# Altium PCB LKBulls2023.PcbDoc (part 1 of 2)
Units mm, origin at the board's own origin, x right, y up, seen from the top; angles counter-clockwise.
Board outline 150 x 145 mm, 2 copper layers (Top Layer, Bottom Layer), stack 1.586 mm thick; 120 components, 144 nets, 581 pads, 331 vias.
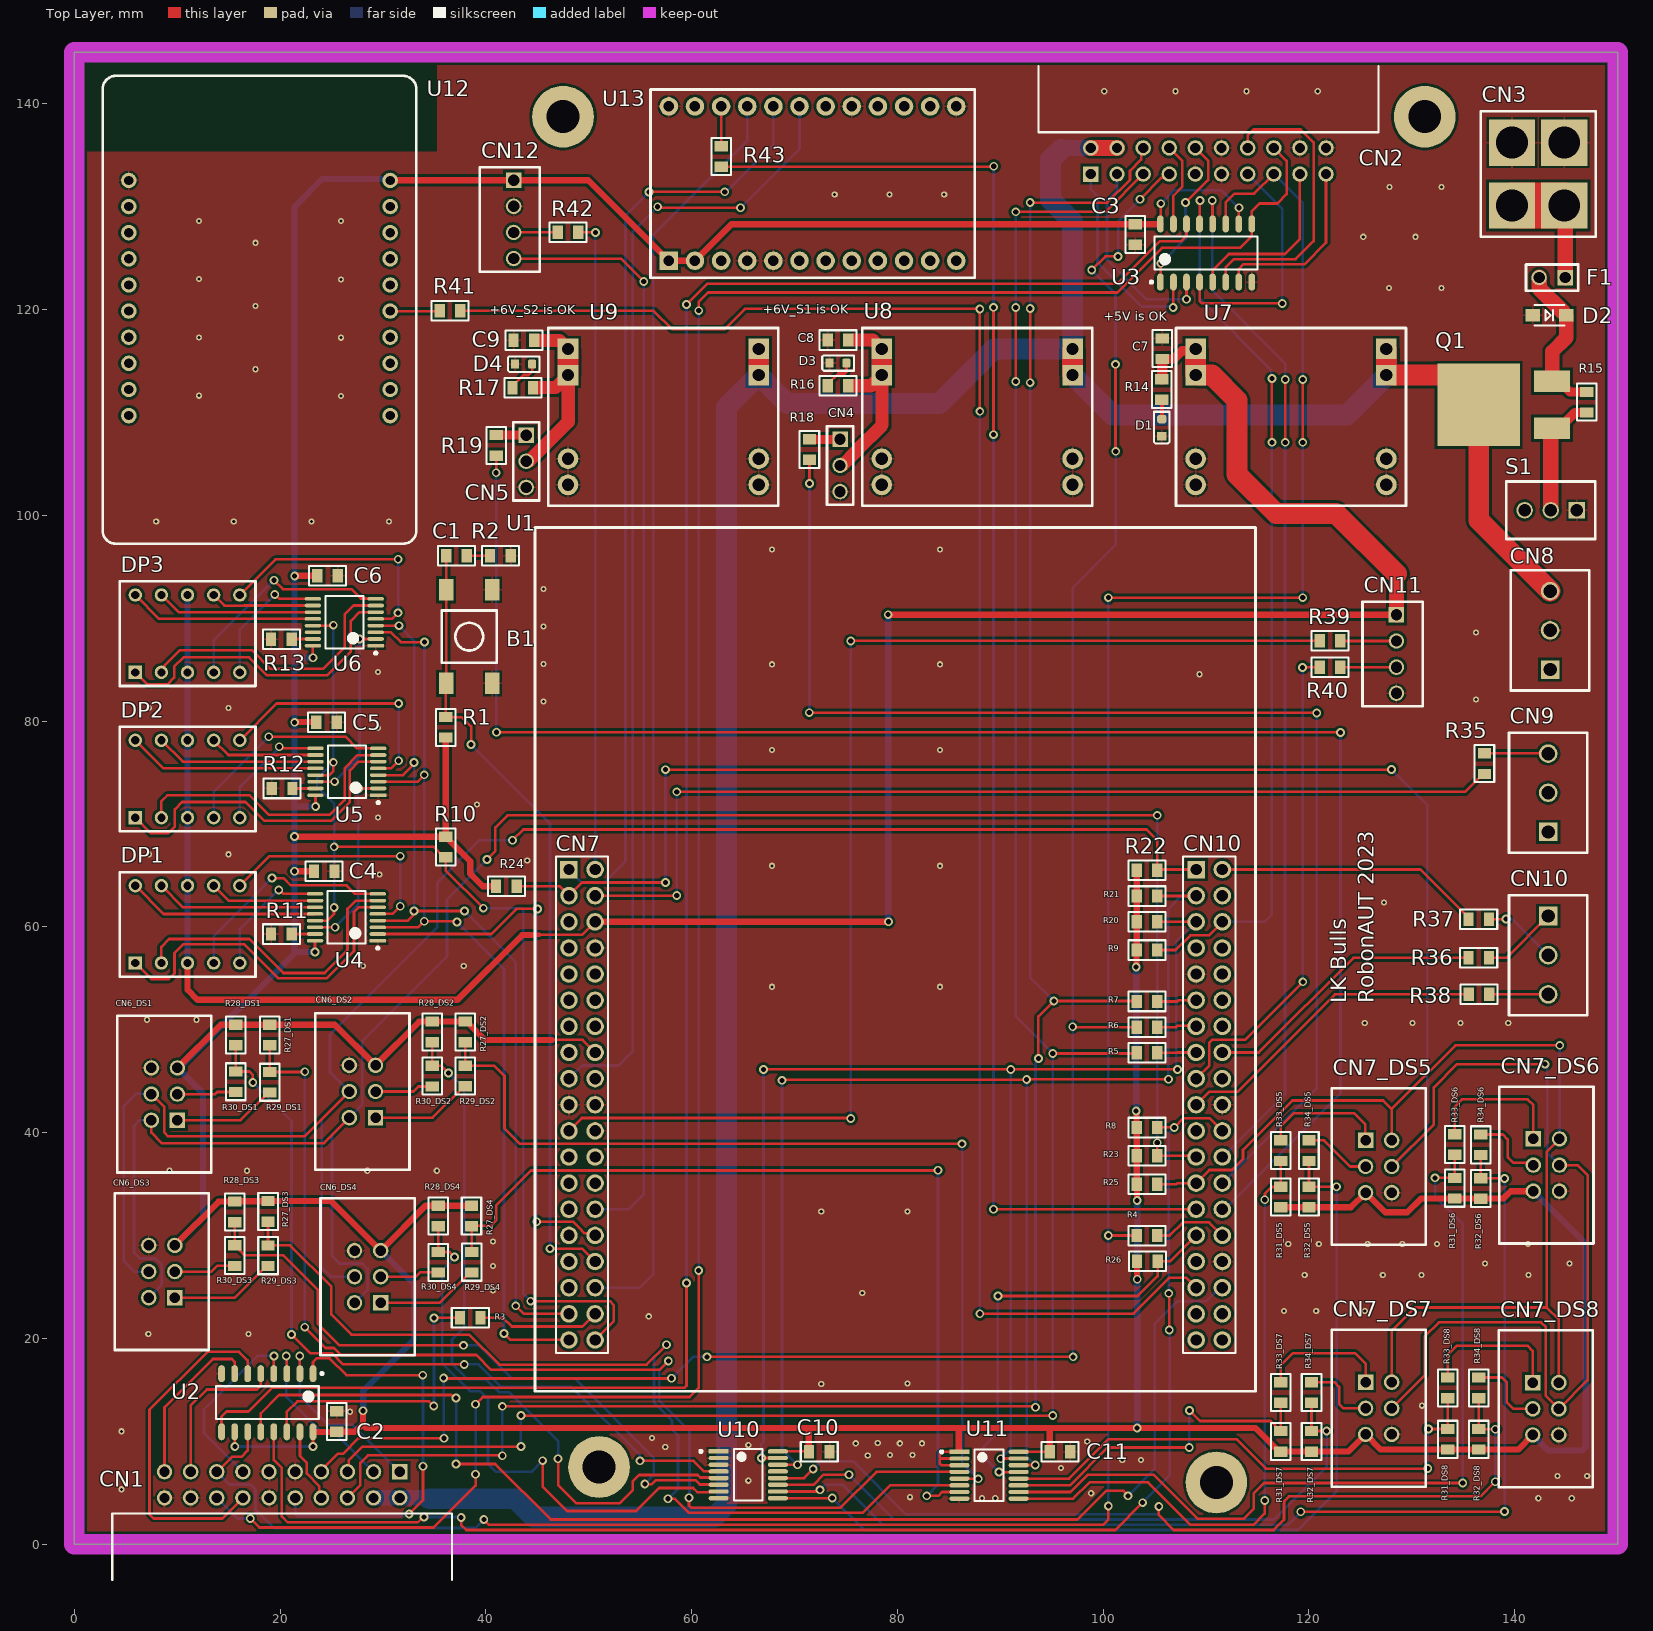
[diagram p0: Top Layer view]
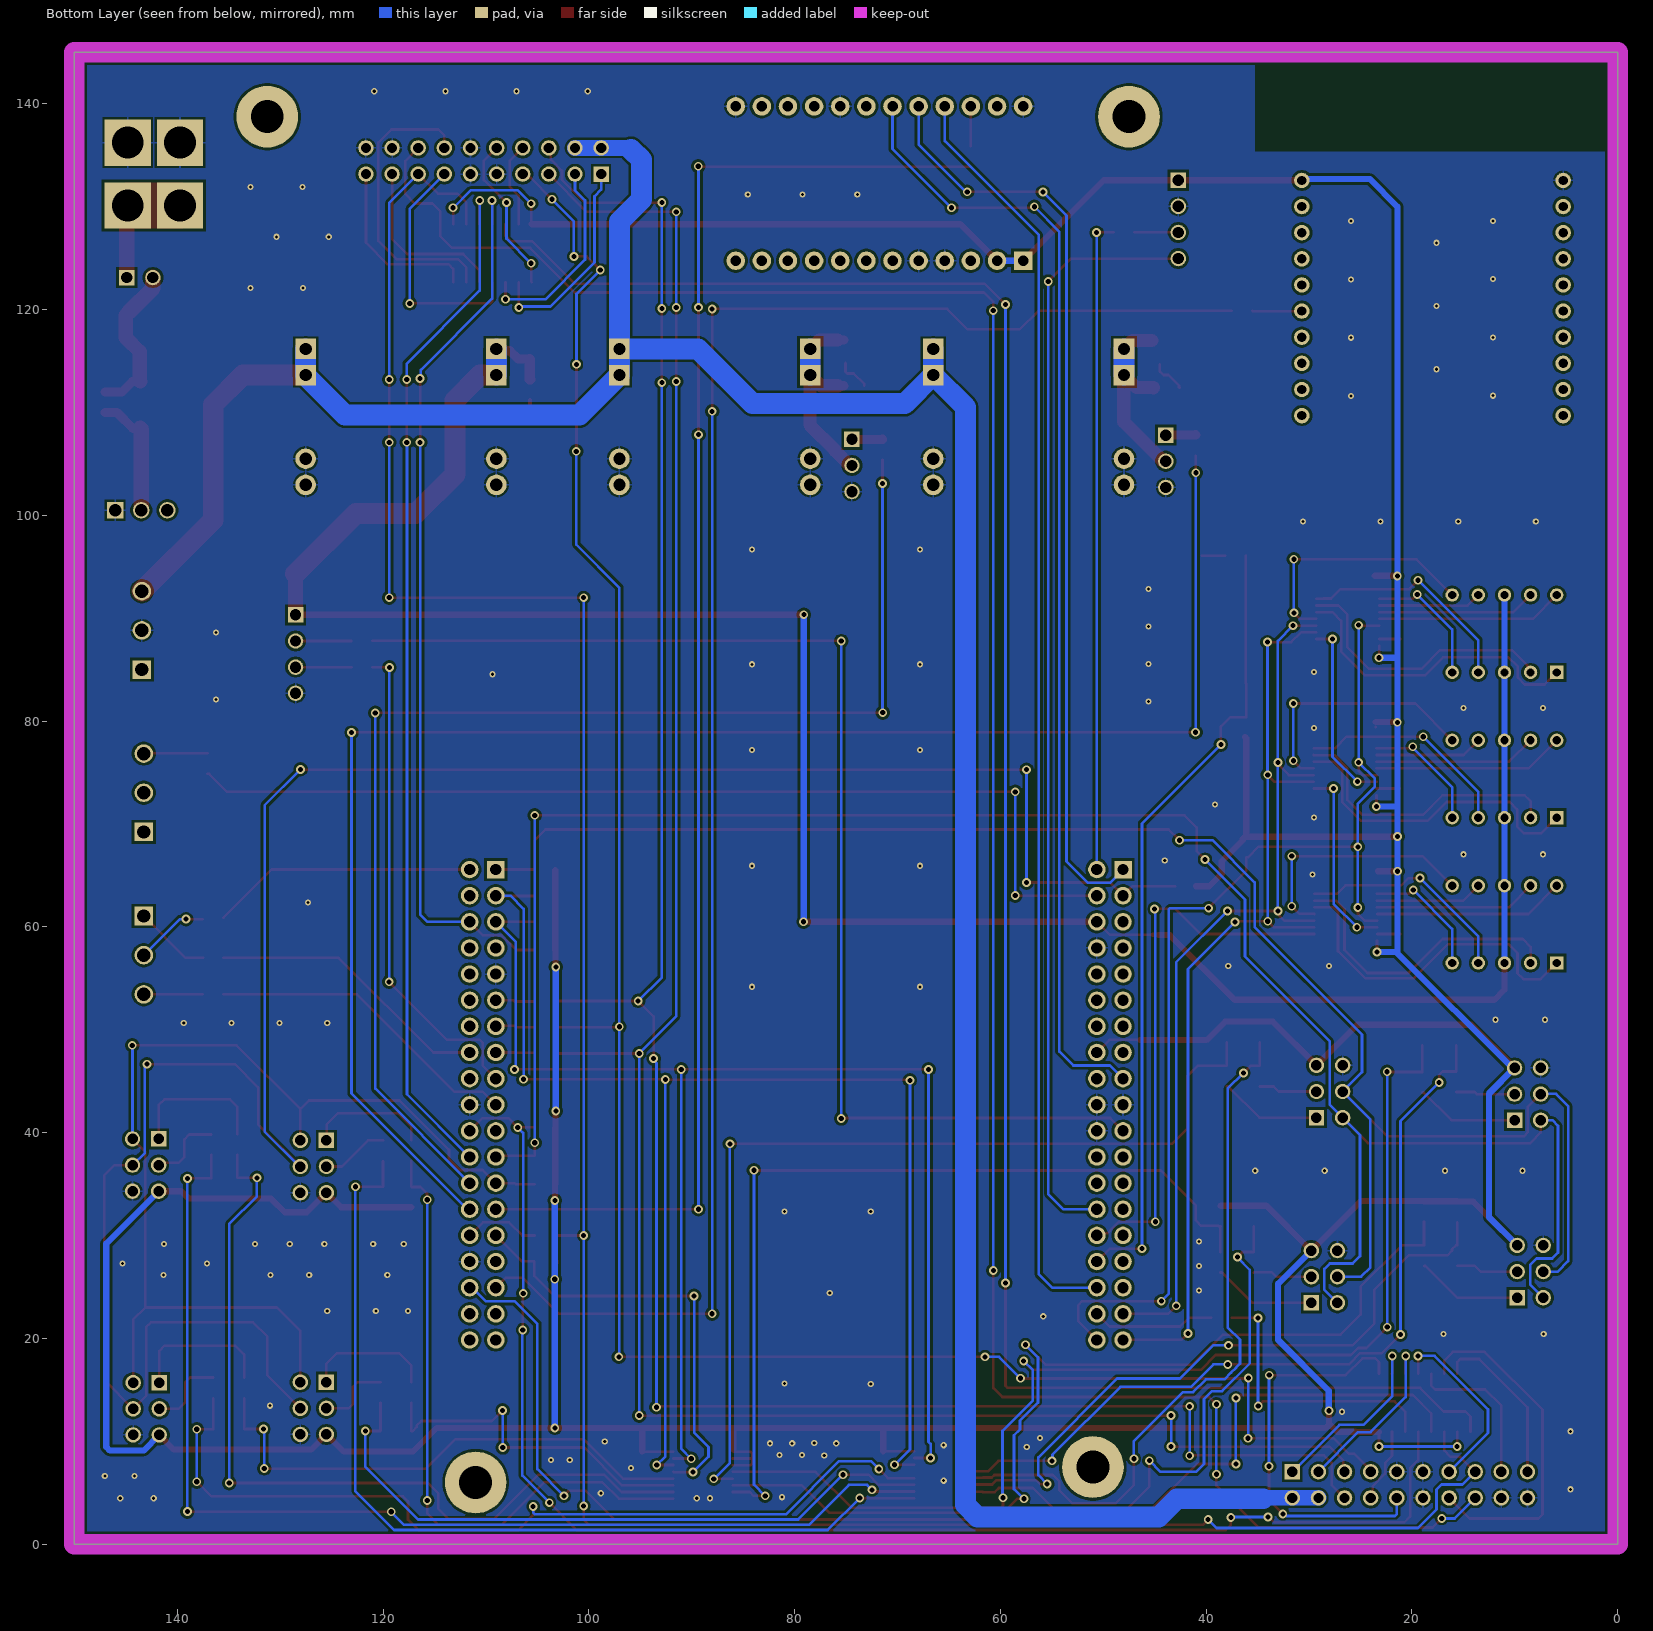
[diagram p1: Bottom Layer view, seen from below]
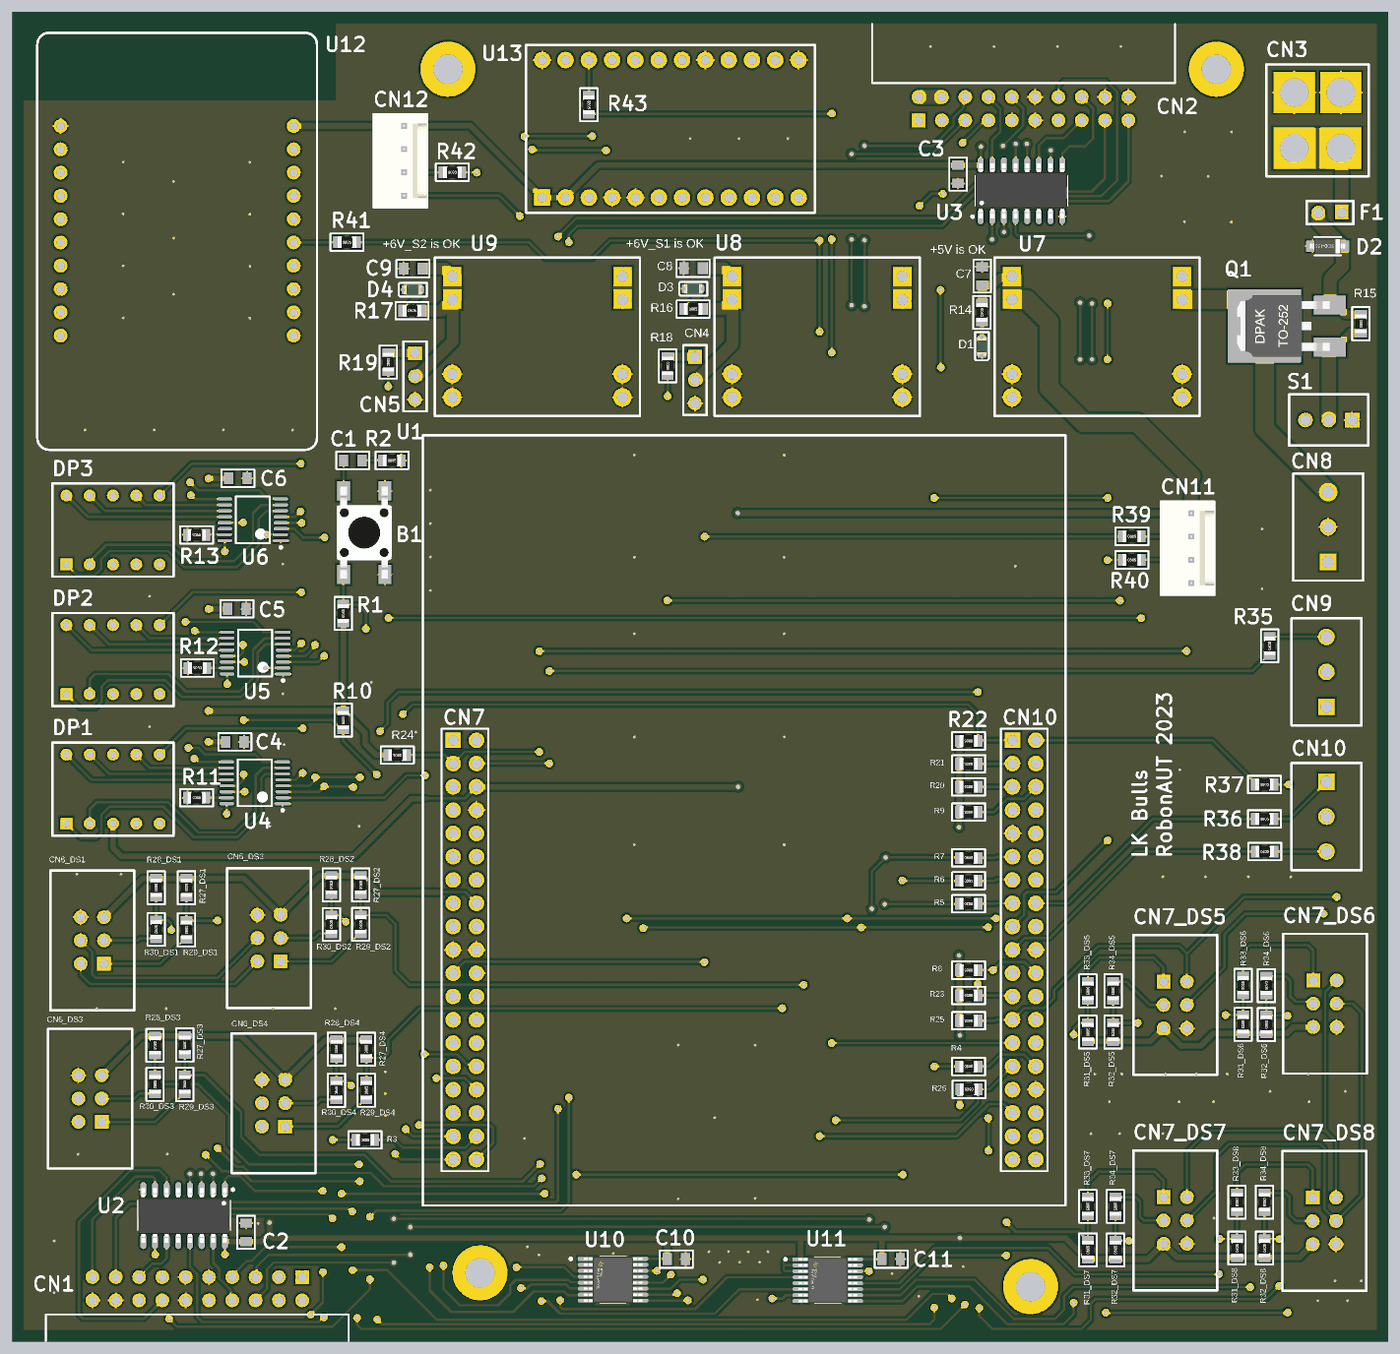
[diagram p3: 3D render of the assembled board from above, using the file's embedded part models]

## Layer stack, top to bottom
Top Solder: solder mask 0.0102, Solder Resist, Dk 3.5
Top Layer: signal copper 0.018
Dielectric1: core 1.55, FR-4, Dk 4.8
Bottom Layer: signal copper 0.018
Bottom Solder: solder mask 0.0102, Solder Resist, Dk 3.5

## Board outline
150,0 0,0 0,145 150,145

## Design rules (kind name [scope] priority, off if disabled: settings)
BoardOutlineClearance [All] p1: gap=0.25 ignorepadtopadclearanceinfootprint=FALSE except(0: Arc-SplitContinuation Track-SplitContinuation SMDPad-SplitContinuation THPad-SplitContinuation Via-SplitContinuation Fill-SplitContinuation Poly-SplitContinuation Region-SplitContinuation Text-SplitContinuation)
Clearance Clearance-xPP-xTP-xTT [All] p1: gap=0.254 ignorepadtopadclearanceinfootprint=FALSE except(0: Arc-Hole Track-Hole SMDPad-Hole THPad-Hole Via-Hole Fill-Hole Poly-Hole Region-Hole Text-Hole; 0.229: SMDPad-SMDPad)
ComponentClearance [All] p1: gap=0.25 collisioncheckmode=3 verticalgap=0.25 showdistances=FALSE
DiffPairsRouting [All] p1: maxlimit=0.25 minlimit=0.25 mostfreqgap=0.25 toplayer_minwidth=0.381 toplayer_maxwidth=0.381 toplayer_prefwidth=0.381 bottomlayer_minwidth=0.381 bottomlayer_maxwidth=0.381 bottomlayer_prefwidth=0.381 maxuncoupledlength=12.5
Height [All] p1: minheight=0 maxheight=25 prefheight=12.5
HoleSize HoleSize-PTH [All] p1: absolutevalues=TRUE maxlimit=6 minlimit=0.3 maxpercent=80.000 minpercent=20.000
HoleToHoleClearance [All] p1: gap=0.35 allowstackedmicrovias=TRUE
MinimumAnnularRing "Minimum IAR  >0.45mm" [((ObjectKind = 'Pad') OR (ObjectKind = 'Via')) And (Layer = 'MultiLayer') And (HoleDiameter > AsMM(0.45))] p1: minimumring=0.175 // minimum inner annular ring for pads > 0.45mm finished hole size
MinimumAnnularRing "Minimum IAR <=0.45mm" [((ObjectKind = 'Pad') OR (ObjectKind = 'Via')) And (Layer = 'MultiLayer') And (HoleDiameter <= AsMM(0.45))] p2: minimumring=0.15 // minimum inner annular ring for pads <= 0.45mm finished hole size
MinimumSolderMaskSliver [All] p1: minsoldermaskwidth=0.08
PlaneClearance PlaneClearance-IPI [All] p1: clearance=0.25
PlaneConnect [All] p1: planeconnectstyle=Relief reliefexpansion=0.175 reliefentries=4 reliefconductorwidth=0.2 reliefairgap=0.2
PolygonConnect PolygonConnect_4 [InNet('GND') vs HasFootprint('TáP AKKSIHOZ')] p1: connectstyle=Relief reliefconductorwidth=2.286 reliefentries=4 polygonreliefangle="90 Angle" airgapwidth=0.254
PolygonConnect PolygonConnect_3 [InNet('NetF1_2') vs InNet('NetF1_2')] p2: connectstyle=Relief reliefconductorwidth=1.27 reliefentries=4 polygonreliefangle="90 Angle" airgapwidth=0.254
PolygonConnect PolygonConnect_2 [InNet('11.1V') vs InNet('11.1V')] p3: connectstyle=Relief reliefconductorwidth=1.27 reliefentries=4 polygonreliefangle="90 Angle" airgapwidth=0.254
PolygonConnect PolygonConnect_1 [InNet('NetCN_4_1') vs InNet('NetCN_4_1')] p4: connectstyle=Relief reliefconductorwidth=1.27 reliefentries=4 polygonreliefangle="90 Angle" airgapwidth=0.254
PolygonConnect [InNet('6V_1') vs InNet('6V_1')] p5: connectstyle=Relief reliefconductorwidth=1.27 reliefentries=4 polygonreliefangle="90 Angle" airgapwidth=0.254
PolygonConnect PolygonConnect-xTW [All] p6: connectstyle=Relief reliefconductorwidth=0.2 reliefentries=4 polygonreliefangle="90 Angle" airgapwidth=0.2
RoutingCorners [All] p1: cornerstyle=45-Degree minsetback=2.5 maxsetback=2.5
RoutingVias My_RoutingVias [All] p1: holewidth=0.4 width=0.8 viastyle="Through Hole" minholewidth=0.3 minwidth=0.6 maxholewidth=0.7 maxwidth=1.3
RoutingVias "RoutingVias > 0.45mm" [(ObjectKind = 'Via') And (HoleDiameter > AsMM(0.45))] p2: holewidth=0.5 width=0.85 viastyle="Through Hole" minholewidth=0.5 minwidth=0.85 maxholewidth=0.9 maxwidth=1.25 // finishet hole size > 0.45mm
RoutingVias "RoutingVias <= 0.45mm" [(ObjectKind = 'Via') And (HoleDiameter <= AsMM(0.45))] p3: holewidth=0.3 width=0.65 viastyle="Through Hole" minholewidth=0.25 minwidth=0.6 maxholewidth=0.45 maxwidth=0.8 // finishet hole size <= 0.45mm
SilkToSilkClearance [All] p1: silktosilkclearance=0.2
SilkToSolderMaskClearance SilkscreenOverComponentPads [IsPad] p1: minsilkscreentomaskgap=0.17 clearancetoexposedcopper=TRUE
SolderMaskExpansion [All] p1: expansion=0.1 istentingtop=FALSE
UnRoutedNet [All] p1: checkbadconnections=TRUE
Width Width-xTW [All] p1: maxlimit=6 minlimit=0.254 preferedwidth=0.305 minimp=50.000000 maximp=50.000000 favimp=50.000000
18 further rules are at their usual default settings.

## Classes and differential pairs
channel class VL53L1X-SATEL: DS1 DS2 DS3 DS4
channel class 53L0-SATEL-I1: DS5 DS6 DS7 DS8

## Components (designator, comment, footprint, x,y, rotation, side; value= is the part's Value field where it differs from the comment)
B1 "Button" FP_BTN_SMD 38.379,88.214 r0 top
C1 "100nF" FP_0805_CAP_085 37.135,96.088 r180 top
C2 "100nF" FP_0805_CAP_085 25.501,11.923 r270 top
C3 "100nF" FP_0805_CAP_085 103.1,127.3 r90 top
C4 "100nF" FP_0805_CAP_085 24.282,65.405 r180 top
C5 "100nF" FP_0805_CAP_085 24.511,79.908 r180 top
C6 "100nF" FP_0805_CAP_085 24.613,94.132 r180 top
C7 "100nF" FP_0805_CAP_085 105.725,116.2 r270 top
C8 "100nF" FP_0805_CAP_085 74.219,117.043 r0 top
C9 "100nF" FP_0805_CAP_085 43.688,117.018 r0 top
C10 "100nF" FP_0805_CAP_085 72.4,9 r180 top
C11 "100nF" FP_0805_CAP_085 95.8,9 r180 top
CN1 "Line Sensor Connector" CONNECTOR-20P 31.62,7.04 r0 top
CN2 "Line Sensor Connector" CONNECTOR-20P 98.8,133.175 r180 top
CN3 "LiPo Connector" FP_BATTERY 142.275,133.175 r0 top
CN4 "Front Servo" FP_CONN3_TUSKE_254MM 74.422,107.391 r180 top
CN5 "Rear Servo" FP_CONN3_TUSKE_254MM 43.917,107.798 r180 top
CN6_DS1 "ST VL53L1X-SATEL" FP_DISTANCE_SENSOR 8.75,43.75 r90 top (schematic designator CN6)
CN6_DS2 "ST VL53L1X-SATEL" FP_DISTANCE_SENSOR 28,44 r90 top (schematic designator CN6)
CN6_DS3 "ST VL53L1X-SATEL" FP_DISTANCE_SENSOR 8.5,26.5 r90 top (schematic designator CN6)
CN6_DS4 "ST VL53L1X-SATEL" FP_DISTANCE_SENSOR 28.5,26 r90 top (schematic designator CN6)
CN7_DS5 "ST VL53L0X-SATEL" FP_DISTANCE_SENSOR 126.77,36.71 r270 top (schematic designator CN7)
CN7_DS6 "ST VL53L0X-SATEL" FP_DISTANCE_SENSOR 143.08,36.85 r270 top (schematic designator CN7)
CN7_DS7 "ST VL53L0X-SATEL" FP_DISTANCE_SENSOR 126.77,13.21 r270 top (schematic designator CN7)
CN7_DS8 "ST VL53L0X-SATEL" FP_DISTANCE_SENSOR 143.02,13.16 r270 top (schematic designator CN7)
CN8 "Motor Control CN2" DC_Drive_CN_Stelvio 143.434,88.824 r270 top
CN9 "Motor Control CN4" DC_Drive_CN_Stelvio 143.25,73.037 r270 top
CN10 "Motor Control CN5" DC_Drive_CN_Stelvio 143.25,57.25 r90 top
CN11 "Magnetic Encoder" FP_CONN4_TAP_254MM 128.5,90.33 r180 top
CN12 "Bluetooth Module" FP_CONN4_TAP_254MM 42.7,132.58 r180 top
D1 "LED" FP_0805_LED_GREEN 105.7,108.525 r270 top
D2 "16V" FP_SOD-123 141.739,119.456 r0 top
D3 "LED" FP_0805_LED_GREEN 74.219,114.808 r180 top
D4 "LED" FP_0805_LED_GREEN 43.663,114.706 r180 top
DP1 "7 Segment Display" FP_7_Segment_Display 11,60.25 r90 top
DP2 "7 Segment Display" FP_7_Segment_Display 11,74.375 r90 top
DP3 "7 Segment Display" FP_7_Segment_Display 11,88.5 r90 top
F1 "Fuse" FP_CONN2_TUSKE_254MM 144.907,123.114 r90 top
Q1 "PMOS" FP_DPAK-TO252 136.5,110.75 r90 top
R1 "4K7" FP_0805_RES 36.093,79.4 r270 top
R2 "100R" FP_0805_RES 41.402,96.088 r0 top
R3 "1K" FP_0805_RES 38.481,21.996 r0 top
R4 "1K" FP_0805_RES 104.25,30 r0 top
R5 "1K" FP_0805_RES 104.25,47.75 r0 top
R6 "1K" FP_0805_RES 104.25,50.25 r0 top
R7 "1K" FP_0805_RES 104.25,52.75 r0 top
R8 "10K" FP_0805_RES 104.25,40.5 r180 top
R9 "10K" FP_0805_RES 104.25,57.75 r180 top
R10 "10K" FP_0805_RES 36.093,67.767 r90 top
R11 "3K9" FP_0805_RES 20.117,59.309 r180 top
R12 "3K9" FP_0805_RES 20.193,73.457 r180 top
R13 "3K9" FP_0805_RES 20.117,87.96 r180 top
R14 "560R" FP_0805_RES 105.7,112.225 r90 top
R15 "100K" FP_0805_RES 147,111 r90 top
R16 "750R" FP_0805_RES 74.219,112.598 r0 top
R17 "750R" FP_0805_RES 43.586,112.42 r0 top
R18 "1K" FP_0805_RES 71.45,106.401 r90 top
R19 "1K" FP_0805_RES 40.996,106.807 r90 top
R20 "1K" FP_0805_RES 104.25,60.5 r180 top
R21 "1K" FP_0805_RES 104.25,63 r180 top
R22 "1K" FP_0805_RES 104.25,65.5 r180 top
R23 "1K" FP_0805_RES 104.25,37.75 r180 top
R24 "1K" FP_0805_RES 41.986,63.957 r180 top
R25 "1K" FP_0805_RES 104.25,35 r180 top
R26 "10K" FP_0805_RES 104.292,27.508 r180 top
R27_DS1 "10K" FP_0805_RES 19,49.5 r270 top (schematic designator R27)
R27_DS2 "10K" FP_0805_RES 38,49.8 r270 top (schematic designator R27)
R27_DS3 "10K" FP_0805_RES 18.825,32.35 r270 top (schematic designator R27)
R27_DS4 "10K" FP_0805_RES 38.6,31.9 r270 top (schematic designator R27)
R28_DS1 "10K" FP_0805_RES 15.7,49.5 r270 top (schematic designator R28)
R28_DS2 "10K" FP_0805_RES 34.8,49.8 r270 top (schematic designator R28)
R28_DS3 "10K" FP_0805_RES 15.575,32.3 r270 top (schematic designator R28)
R28_DS4 "10K" FP_0805_RES 35.35,31.9 r270 top (schematic designator R28)
R29_DS1 "1K" FP_0805_RES 19,44.9 r90 top (schematic designator R29)
R29_DS2 "1K" FP_0805_RES 38,45.5 r90 top (schematic designator R29)
R29_DS3 "1K" FP_0805_RES 18.821,28.042 r90 top (schematic designator R29)
R29_DS4 "1K" FP_0805_RES 38.608,27.407 r90 top (schematic designator R29)
R30_DS1 "1K" FP_0805_RES 15.7,44.95 r90 top (schematic designator R30)
R30_DS2 "1K" FP_0805_RES 34.798,45.491 r90 top (schematic designator R30)
R30_DS3 "1K" FP_0805_RES 15.575,28.05 r90 top (schematic designator R30)
R30_DS4 "1K" FP_0805_RES 35.35,27.4 r90 top (schematic designator R30)
R31_DS5 "10K" FP_0805_RES 117.25,33.75 r90 top (schematic designator R31)
R31_DS6 "10K" FP_0805_RES 134.162,34.6 r90 top (schematic designator R31)
R31_DS7 "10K" FP_0805_RES 117.25,10 r90 top (schematic designator R31)
R31_DS8 "10K" FP_0805_RES 133.5,10.2 r90 top (schematic designator R31)
R32_DS5 "10K" FP_0805_RES 120,33.75 r90 top (schematic designator R32)
R32_DS6 "10K" FP_0805_RES 136.699,34.575 r90 top (schematic designator R32)
R32_DS7 "10K" FP_0805_RES 120.25,10 r90 top (schematic designator R32)
R32_DS8 "10K" FP_0805_RES 136.5,10.2 r90 top (schematic designator R32)
R33_DS5 "1K" FP_0805_RES 117.25,38.25 r270 top (schematic designator R33)
R33_DS6 "1K" FP_0805_RES 134.162,38.85 r270 top (schematic designator R33)
R33_DS7 "1K" FP_0805_RES 117.25,14.75 r270 top (schematic designator R33)
R33_DS8 "1K" FP_0805_RES 133.5,15.2 r270 top (schematic designator R33)
R34_DS5 "1K" FP_0805_RES 120,38.25 r270 top (schematic designator R34)
R34_DS6 "1K" FP_0805_RES 136.699,38.825 r270 top (schematic designator R34)
R34_DS7 "1K" FP_0805_RES 120.25,14.75 r270 top (schematic designator R34)
R34_DS8 "1K" FP_0805_RES 136.5,15.2 r270 top (schematic designator R34)
R35 "1K" FP_0805_RES 137.058,75.87 r90 top
R36 "1K" FP_0805_RES 136.5,57 r0 top
R37 "1K" FP_0805_RES 136.5,60.75 r0 top
R38 "1K" FP_0805_RES 136.525,53.442 r0 top
R39 "1K" FP_0805_RES 122.047,87.808 r0 top
R40 "1K" FP_0805_RES 122.047,85.242 r0 top
R41 "1K" FP_0805_RES 36.5,119.888 r0 top
R42 "1K" FP_0805_RES 47.981,127.508 r180 top
R43 "1K" FP_0805_RES 62.865,134.874 r270 top
S1 "SPDT" FP_SPDT 143.5,100.5 r90 top
U1 "NUCLEO-F446RE" FP_NUCLEO-64 48.075,65.575 r0 top
U2 "74HC595D" SO16 18.75,13.75 r270 top
U3 "74HC595D" SO16 110,125.5 r90 top
U4 "STP08CP05TTR" SOP127P600-sajat_0095-015 26.441,60.935 r180 top
U5 "STP08CP05TTR" SOP127P600-sajat_0095-015 26.484,75.082 r180 top
U6 "STP08CP05TTR" SOP127P600-sajat_0095-015 26.238,89.611 r180 top
U7 "DSN-1504-3A" FP_DCDC_DSN 118.25,109.572 r180 top
U8 "DSN-1504-3A" FP_DCDC_DSN 87.75,109.572 r180 top
U9 "DSN-1504-3A" FP_DCDC_DSN 57.25,109.572 r180 top
U10 "I2C GPIO Expander" FP_TCA9534PWR 65.5,6.75 r0 top
U11 "I2C GPIO Expander" FP_TCA9534PWR 88.9,6.7 r0 top
U12 "SLTB004A" SLTB004A 2.75,97.25 r0 top
U13 "STEVAL-MKI178V1" FP_STEVAL_IMU 71.75,132.25 r90 top

## Footprints (in the part's own frame and the unit in brackets; to place one, negate y for a bottom-side part, rotate by r counter-clockwise, add the part's x,y. Pads: shape width x height; smd on the part's side, far side on the other; paste and mask are expansions set on the pad)
CONNECTOR-20P [mm] "Right angle ribbon cable connector"
  rect 1.5x1.5 hole 1: 1(0,0)
  round 1.5 hole 1: 2(0,-2.54) 3(-2.54,0) 4(-2.54,-2.54) 5(-5.08,0) 6(-5.08,-2.54) 7(-7.62,0) 8(-7.62,-2.54) 9(-10.16,0) 10(-10.16,-2.54) 11(-12.7,0) 12(-12.7,-2.54) 13(-15.24,0) 14(-15.24,-2.54) 15(-17.78,0) 16(-17.78,-2.54) 17(-20.32,0) 18(-20.32,-2.54) 19(-22.86,0) 20(-22.86,-2.54)
  silkscreen extent -27.94,-10.5 5.08,-4.06, body extent -28.04,-13.3 5.18,-3.96, height 8.95
DC_Drive_CN_Stelvio [mm] "3-as konnektor DC_Drivehoz"
  rect 1.8x1.8 hole 1.3: 1(3.81,0)
  round 1.8 hole 1.3: 2(0,0) 3(-3.81,0)
  silkscreen extent -5.84,-3.81 5.84,3.81, body extent -5.84,-3.81 5.84,3.81, height 9.1
FP_7_Segment_Display [mm]
  rect 1.3x1.3 hole 0.8: 1(-3.76,5.08)
  round 1.3 hole 0.8: 2(-3.76,2.54) 3(-3.76,0) 4(-3.76,-2.54) 5(-3.76,-5.08) 6(3.76,-5.08) 7(3.76,-2.54) 8(3.76,0) 9(3.76,2.54) 10(3.76,5.08)
  silkscreen extent -5.08,-6.6 5.08,6.6, body extent -5.08,-6.6 5.08,6.6, height 7
FP_0805_CAP_085 [mm] "0805 kapacitás YAGEO 0.85mm magas"
  rect 1x1.3 smd: 1(-1,0) 2(1,0)
  silkscreen extent -1.8,-0.95 1.8,0.95, body extent -1,-0.64 1.03,0.64, height 0.85
FP_0805_LED_GREEN [mm] "0805 méretű zöld LED"
  rrect50% 0.8x0.9 smd: A(-0.825,0)
  rect 0.8x0.9 smd: K(0.825,0)
  silkscreen extent -1.55,-0.75 1.53,0.75, body extent -1.01,-0.63 1.01,0.62, height 1.1
FP_0805_RES [mm] "0805 ellenállás"
  rect 1x1.3 smd: 1(-1,0) 2(1,0)
  silkscreen extent -1.8,-0.95 1.8,0.95, body extent -1,-0.62 1,0.63, height 0.62
FP_BATTERY [mm]
  rect 4.5x4.5 hole 3.1: 1(-2.54,-3.048) 1(2.54,-3.048) 2(-2.54,3.048) 2(2.54,3.048)
  silkscreen extent -5.59,-6.1 5.59,6.1, body extent -5.59,-6.1 5.59,6.1, height 5
FP_BTN_SMD [mm] "SMD Push Button 6x6mm"
  rect 1.4x2.1 smd: 1(2.25,4.55) 2(2.25,-4.55) 3(-2.25,4.55) 4(-2.25,-4.55)
  silkscreen extent -2.67,-2.54 2.67,2.54, body extent -3,-5 3,5, height 5.1
FP_CONN2_TUSKE_254MM [mm] "2×1 tüskesor"
  rect 1.5x1.5 hole 1.1: 1(0,0)
  round 1.5 hole 1.1: 2(0,2.54)
  silkscreen extent -1.27,-1.27 1.27,3.81, body extent -1.27,-1.27 1.27,3.81, height 8.54
FP_CONN3_TUSKE_254MM [mm] "3×1 tüskesor"
  rect 1.5x1.5 hole 1.1: 1(0,0)
  round 1.5 hole 1.1: 2(0,2.54) 3(0,5.08)
  silkscreen extent -1.27,-1.27 1.27,6.35, body extent -1.27,-1.27 1.27,6.35, height 8.54
FP_CONN4_TAP_254MM [mm] "álló két pólusú tápcsatlakozó 2.54mm"
  rect 1.5x1.5 hole 1.1: 1(0,0)
  round 1.5 hole 1.1: 2(0,2.54) 3(0,5.08) 4(0,7.62)
  silkscreen extent -2.54,-1.27 3.3,8.89, body extent -2.52,-1.27 3.28,8.89, height 11.56
FP_DCDC_DSN [mm]
  round 2 hole 1.2: 1(-9.271,6.604) 2(-9.271,4.064) 5(9.271,6.604) 6(9.271,4.064)
  rect 2x2 hole 1.2: 3(-9.271,-4.064) 4(-9.271,-6.604) 7(9.271,-4.064) 8(9.271,-6.604)
  silkscreen extent -11.18,-8.64 11.18,8.64, body extent -11.18,-8.64 11.18,8.64, height 4
FP_DISTANCE_SENSOR [mm] "6 pins"
  rect 1.5x1.5 hole 1.02: 1(-2.54,-1.27)
  round 1.5 hole 1.02: 2(-2.54,1.27) 3(0,-1.27) 4(0,1.27) 5(2.54,-1.27) 6(2.54,1.27)
  silkscreen extent -7.62,-4.57 7.62,4.57, body extent -7.87,-4.57 7.87,4.57, height 8.8
FP_DPAK-TO252 [mm] "D-PAK Package"
  rect 2.08x3.5 smd: 1(-2.286,-7.112) 3(2.286,-7.112)
  rect 8x8 smd: 2(0,0)
  body extent -3.37,-7.11 3.37,2.99, height 2.37
FP_NUCLEO-64 [mm]
  rect 1.7x1.7 hole 1.1: 1(0,0) 39(60.96,0)
  round 1.7 hole 1.1: 2(2.54,0) 3(0,-2.54) 4(2.54,-2.54) 5(0,-5.08) 6(2.54,-5.08) 7(0,-7.62) 8(2.54,-7.62) 9(0,-10.16) 10(2.54,-10.16) 11(0,-12.7) 12(2.54,-12.7) 13(0,-15.24) 14(2.54,-15.24) 15(0,-17.78) 16(2.54,-17.78) 17(0,-20.32) 18(2.54,-20.32) 19(0,-22.86) 20(2.54,-22.86) 21(0,-25.4) 22(2.54,-25.4) 23(0,-27.94) 24(2.54,-27.94) 25(0,-30.48) 26(2.54,-30.48) 27(0,-33.02) 28(2.54,-33.02) 29(0,-35.56) 30(2.54,-35.56) 31(0,-38.1) 32(2.54,-38.1) 33(0,-40.64) 34(2.54,-40.64) 35(0,-43.18) 36(2.54,-43.18) 37(0,-45.72) 38(2.54,-45.72) 40(63.5,0) 41(60.96,-2.54) 42(63.5,-2.54) 43(60.96,-5.08) 44(63.5,-5.08) 45(60.96,-7.62) 46(63.5,-7.62) 47(60.96,-10.16) 48(63.5,-10.16) 49(60.96,-12.7) 50(63.5,-12.7) 51(60.96,-15.24) 52(63.5,-15.24) 53(60.96,-17.78) 54(63.5,-17.78) 55(60.96,-20.32) 56(63.5,-20.32) 57(60.96,-22.86) 58(63.5,-22.86) 59(60.96,-25.4) 60(63.5,-25.4) 61(60.96,-27.94) 62(63.5,-27.94) 63(60.96,-30.48) 64(63.5,-30.48) 65(60.96,-33.02) 66(63.5,-33.02) 67(60.96,-35.56) 68(63.5,-35.56) 69(60.96,-38.1) 70(63.5,-38.1) 71(60.96,-40.64) 72(63.5,-40.64) 73(60.96,-43.18) 74(63.5,-43.18) 75(60.96,-45.72) 76(63.5,-45.72)
  silkscreen extent -3.3,-50.72 66.72,33.25, body extent -3.3,-50.72 66.72,33.25, height 11
FP_SOD-123 [mm]
  rect 1.41x1.22 smd: A(0,0) K(3.27,0)
  silkscreen extent 0.2,-1 3.1,1, body extent -0.3,-0.85 3.55,0.85, height 1.47
FP_SPDT [mm]
  rect 1.6x1.6 hole 1.2: 1(0,-2.54)
  round 1.6 hole 1.2: 2(0,0) 3(0,2.54)
  silkscreen extent -2.79,-4.32 2.79,4.32, body extent -2.79,-4.32 2.79,4.32, height 22.5
FP_STEVAL_IMU [mm] "20 tüske anya"
  rect 1.8x1.8 hole 1.02: 1(-7.5,13.97)
  round 1.8 hole 1.02: 2(-7.5,11.43) 3(-7.5,8.89) 4(-7.5,6.35) 5(-7.5,3.81) 6(-7.5,1.27) 7(-7.5,-1.27) 8(-7.5,-3.81) 9(-7.5,-6.35) 10(-7.5,-8.89) 11(-7.5,-11.43) 12(-7.5,-13.97) 13(7.5,-13.97) 14(7.5,-11.43) 15(7.5,-8.89) 16(7.5,-6.35) 17(7.5,-3.81) 18(7.5,-1.27) 19(7.5,1.27) 20(7.5,3.81) 21(7.5,6.35) 22(7.5,8.89) 23(7.5,11.43) 24(7.5,13.97)
  silkscreen extent -9.14,-15.75 9.14,15.75, body extent -9.14,-15.75 9.14,15.75, height 10.1
FP_TCA9534PWR [mm]
  rect 1.955x0.421 smd paste+0 mask+0: 1(-2.875,2.275)
  rrect100% 1.955x0.421 smd paste+0 mask+0: 2(-2.875,1.625) 3(-2.875,0.975) 4(-2.875,0.325) 5(-2.875,-0.325) 6(-2.875,-0.975) 7(-2.875,-1.625) 8(-2.875,-2.275) 9(2.875,-2.275) 10(2.875,-1.625) 11(2.875,-0.975) 12(2.875,-0.325) 13(2.875,0.325) 14(2.875,0.975) 15(2.875,1.625) 16(2.875,2.275)
  silkscreen extent -4.73,-2.5 1.4,2.5, body extent -4.35,-3 4.35,3, height 0.25
SLTB004A [mm] "Thunderboard Sense 2 module"
  round 1.5 hole 0.899: 1(2.54,35.306)
  round 1.5 hole 0.9: 2(27.94,35.306) 3(2.54,32.766) 4(27.94,32.766) 5(2.54,30.226) 6(27.94,30.226) 7(2.54,27.686) 8(27.94,27.686) 9(2.54,25.146) 10(27.94,25.146) 11(2.54,22.606) 12(27.94,22.606) 13(2.54,20.066) 14(27.94,20.066) 15(2.54,17.526) 16(27.94,17.526) 17(2.54,14.986) 18(27.94,14.986) 19(2.54,12.446) 20(27.94,12.446)
  Top Layer pour cut-out: -2.032,38.1 -2.032,47.752 32.512,47.752 32.512,38.1
  Bottom Layer pour cut-out: -2.032,38.1 -2.032,47.752 32.512,47.752 32.512,38.1
  silkscreen extent 0,0 30.48,45.47, body extent 0,0 30.5,45.5, height 8.7
SO16 [mm] "SOP, 16-Leads, Body 9,90x3,90mm, Pitch 1,27mm, IPC Low Density"
  oval 1.65x0.65 smd: 1(-2.825,4.445) 2(-2.825,3.175) 3(-2.825,1.905) 4(-2.825,0.635) 5(-2.825,-0.635) 6(-2.825,-1.905) 7(-2.825,-3.175) 8(-2.825,-4.445) 9(2.825,-4.445) 10(2.825,-3.175) 11(2.825,-1.905) 12(2.825,-0.635) 13(2.825,0.635) 14(2.825,1.905) 15(2.825,3.175) 16(2.825,4.445)
  silkscreen extent -2.95,-5 1.6,5.45, body extent -3,-5 3,5, height 1.75
SOP127P600-sajat_0095-015 [mm]
  rect 1.6x0.35 smd: 1(-3.05,2.275)
  oval 1.6x0.35 smd: 2(-3.05,1.625) 3(-3.05,0.975) 4(-3.05,0.325) 5(-3.05,-0.325) 6(-3.05,-0.975) 7(-3.05,-1.625) 8(-3.05,-2.275) 9(3.05,-2.275) 10(3.05,-1.625) 11(3.05,-0.975) 12(3.05,-0.325) 13(3.05,0.325) 14(3.05,0.975) 15(3.05,1.625) 16(3.05,2.275)
  silkscreen extent -3.18,-2.55 1.85,3.12, body extent -2.25,-2.55 2.25,2.55, height 1.2

## Part data
B1: library part "Button 4P", "Push button", Name="TACT-64N-F, Nyomógomb, mikrokapcsoló TACT, SPST-NO, THT, 4.3mm, 6x6mm", Reference=100.224.61, Supplier=Hestore
C1 C2 C3 C4 C5 C6 C7 C8 C9 C10 C11: library part CAP, "Capacitor", Tolerance=10%, Voltage=50V, Name="100nF 0805 10% 50V X7R 0805B104K500NT (FNG)", Reference=82-13-46, Supplier=Lomex
CN1 CN2: library part Connector_Line_Sensor, Name="SZAL.KABEL 20 P APA 90° BHR-20 (T-T)", Reference=43-01-11, Supplier=Lomex
CN3: library part Connector_LiPo, "LiPo Battery Connector", Name="XT60 + CAP Apa", Reference=FD-W115M, Supplier=https://shop.modell.hu/kabel-amass-xt60-cap-apa-csatlakozoval-szerelve
CN4 CN5: library part Connector_servo, "Steering servo / MG-995 servo", Name="TÜSKESOR 40 P PHSS-40- 6/3 (T-T) 2.54mm PIN 0.64x0.64 TÖRDELHETÖ", Reference=43-00-73, Supplier=Lomex
CN6_DS1 CN6_DS2 CN6_DS3 CN6_DS4: library part ST_53L1-SATEL-I1, "53L1-SATEL-I1 satellite board for ranging sensor (max distance 4m)", Name="SZAL.KABEL 6 P APA BH-06 (T-T)", Reference=43-26-63, Supplier=Lomex
CN7_DS5 CN7_DS6 CN7_DS7 CN7_DS8: library part ST_53L0-SATEL-I1, "53L0-SATEL-I1 satellite board for ranging sensor (max distance 2m)", Name="SZAL.KABEL 6 P APA BH-06 (T-T)", Reference=43-26-63, Supplier=Lomex
CN8: library part Motor_Control_CN2, "CN2 connector on the Motor Control PCB", Name="SORKAPOCS 3 P RM3.81 CPP3.81/3 (STE) LIFTES 1mmř 10A", Reference=43-09-55, Supplier=Lomex
CN9: library part Motor_Control_CN4, "CN4 connector on the Motor Control PCB", Name="SORKAPOCS 3 P RM3.81 CPP3.81/3 (STE) LIFTES 1mmř 10A", Reference=43-09-55, Supplier=Lomex
CN10: library part Motor_Control_CN5, "CN5 connector on the Motor Control PCB", Name="SORKAPOCS 3 P RM3.81 CPP3.81/3 (STE) LIFTES 1mmř 10A", Reference=43-09-55, Supplier=Lomex
CN11: library part Connector_Encoder, "Allegro A1333 Magnetic Encoder", Name="TÁPCSATL. 2.54mm 4P APA 180° NCW254-04S (G-S) FORR.", Reference=43-08-97, Supplier=Lomex
CN12: library part Connector_HC-05, "HC-05 tokozva, kérdés, hogy melyik lábon vannak valójában a dolgok", Name="HC-05 bluetooth modul 4P, master-slave, gombbal", Reference=43-08-97, reference1="100.416.39 (gombbal)", reference2="100.355.62 (gomb nélkül)", reference3="100.355.65 (master-slave)", Supplier=Hestore
D1 D3 D4: "Typical RED GaAs LED", Name="2012 GREEN 568nm 70mcd KP-2012MGC (KIN) W.CLEAR 2x1.2x1.1mm 0805 120°", Reference=95-00-57, Supplier=Lomex
D2: library part ZENER, "Zener Diode", Name="16V 0.5W SMSZ1600-35 (MOT) MMSZ5246BT1 SOD-123 ˝J1˝", Reference=85-00-88, Supplier=Lomex, U_Z=16V
DP1 DP2 DP3: library part 7_Segment_Display, Name="FYS-3911BUHR-21 (FYL) 7 SEG SRED COM.AN. 10mm 30mcd 10x13x7mm 640nm", Reference=35-03-94, Supplier=Lomex
Q1: "MOSFET, P CH", Name="IRFR9024NTRPBF (INF) P-POWERFET 55V 11A 38W Rds<0.175R DPAK", Reference=86-01-67, Supplier=Lomex
R1 R2 R3 R4 R5 R6 R7 R8 R9 R10 R11 R12 R13 R14 R15 R16 R17 R18 R19 R20 R21 R22 R23 R24 R25 R26 R27_DS1 R27_DS2 R27_DS3 R27_DS4 R28_DS1 R28_DS2 R28_DS3 R28_DS4 R29_DS1 R29_DS2 R29_DS3 R29_DS4 R30_DS1 R30_DS2 R30_DS3 R30_DS4 R31_DS5 R31_DS6 R31_DS7 R31_DS8 R32_DS5 R32_DS6 R32_DS7 R32_DS8 R33_DS5 R33_DS6 R33_DS7 R33_DS8 R34_DS5 R34_DS6 R34_DS7 R34_DS8 R35 R36 R37 R38 R39 R40 R41 R42 R43: library part RES, "Resistor", Power=0.125W, Tolerance=5%, Supplier=Lomex
  R1: Name="4K70 0805 5% CR-05JL7---4K7 0.125W (VIK)", Reference=81-10-95
  R2: Name="100R 0805 5% RC0805JR-10100RL 0.125W (YAG", Reference=81-34-71
  R3 R4 R5 R6 R7 R18 R19 R20 R21 R22 R23 R24 R25 R29_DS1 R29_DS2 R29_DS3 R29_DS4 R30_DS1 R30_DS2 R30_DS3 R30_DS4 R33_DS5 R33_DS6 R33_DS7 R33_DS8 R34_DS5 R34_DS6 R34_DS7 R34_DS8 R35 R36 R37 R38 R39 R40 R41 R42 R43: Name="1K00 0805 5% CR-05JL7----1K 0.125W (VIK)", Reference=81-10-87
  R8 R9 R10 R26 R27_DS1 R27_DS2 R27_DS3 R27_DS4 R28_DS1 R28_DS2 R28_DS3 R28_DS4 R31_DS5 R31_DS6 R31_DS7 R31_DS8 R32_DS5 R32_DS6 R32_DS7 R32_DS8: Name="10K0 0805 5% CR-05JL7---10K 0.125W (VIK)", Reference=81-10-99
  R11 R12 R13: Name="3K90 0805 5% CR-05JL7---3K9 0.125W (VIK)", Reference=81-10-94
  R14: Name="560R 0805 5% CR-05JL7--560R 0.125W (VIK)", Reference=81-10-84
  R15: Name="100K 0805 5% CR-05JL7--100K 0.125W (VIK)", Reference=81-11-11
  R16 R17: Name="750R 0805 5% CR-05JL7--750R 0.125W (VIK)", Reference=81-12-65
S1: library part "SPDT Switch", "Single-Pole, Double-Throw Switch", Name="TSSM-1022-A2, Kapcsoló, nyelves, 1A/250V AC, M5, SPDT, ON-ON", Reference=100.264.66, Supplier=Hestore
U2 U3: "8-bit serial-in, serial or parallel-out shift register with output latches; 3-state", Name="74HC595D,118 (NXP) 8-BIT SHIFT-REGISTER WITH OUTPUT LATCH SO-16", Reference=87-01-20, Supplier=Lomex
U4 U5 U6: "Low voltage, low current power 8-bit shift register", Name="STP08CP05TTR, Counter Shift Registers Lo Vltg LoCurent Pwr 8B shift register", Reference=Tanszék, Supplier=Tanszék
U7 U8 U9: "Switched-Mode Power Supply (SMPS), Step Down (Synchronous Buck) voltage regulator, Input 4.5-28V, Output 0.8-20V, 3A", Name="DSN-1504-3A, Kapcsolóüzemű step-down feszültségszabályzó, 4.5-28V/0.8-20V, 3A", Reference=100.381.18, Supplier=Hestore
U10 U11: library part TCA9534PWR, "I2C/SMBus Interface 100kHz/400kHz 5.5V 16-Pin TSSOP T/R", Case/Package=TSSOP, Frequency=400kHz, Manufacturer="Texas Instruments", Max Operating Temperature=85°C, Min Operating Temperature=-40°C, Supplier Part Number 1=595-TCA9534PWR, Category="Interface ICs", ComponentLink1Description=https://datasheet.ciiva.com/48508/tca9534-48508117.pdf?src-supplier=Avnet, ComponentLink1URL=https://datasheet.ciiva.com/48508/tca9534-48508117.pdf?src-supplier=Avnet, Interface=I2C, Lead Free="Lead Free", Manufacturer Part Number=TCA9534PWR, Mount="Surface Mount", Name="TCA9534PWR 8 Bit I2C I/O Expander", Number of I/Os=8, Number of Outputs=8, Number of Pins=16, Packaging="Tape and Reel", Pricing 1="1=1,44000, 10=1,30000, 25=1,23000, 50=1,23000, 100=1,01000, 250=0,94400, 500=0,83400, 1000=0,65900, 2000=0,63600, 10000=0,63600 (USD)", Reference=595-TCA9534PWR, RoHS=Yes, RoHS Compliant=Yes, Stock 1=8871, Supplier=Mouser, Supplier 1=Mouser
U12: "SiLabs Thunderboard Sense 2 module", Name="HÜVELY 20 P FHSH-2.54-20 (T-T) 1# h=8,5mm AU", Reference=43-00-08, Supplier=Lomex
U13: "Adapter board for LSM6DS3H 3D digital accelerometer and 3D digital gyroscope , SPI/I2C interface", Name="HÜVELY 40 P FHSH-2.54-40 (T-T) 1# h=8,5mm AU", Reference=43-03-71, Supplier=Lomex
F1: Name="6A 30V 30R600UF POLYFUSE 16.5x16.5mm (LFS)", Reference=44-03-11, Supplier=Lomex
U1: Name="Nucleo F446RE", Reference=NUCLEO, Supplier=Tanszék

## Free pads (board coordinates)
  round 6 hole 3.2: 1(47.5,138.75) 2(131.25,138.75) 3(51,7.5) 4(111,6)

## Via types
v1: diameter 0.85, hole 0.5, Top Layer to Bottom Layer, 172 vias
v2: diameter 0.6, hole 0.3, Top Layer to Bottom Layer, tented both sides, 121 vias
v3: diameter 0.85, hole 0.5, Top Layer to Bottom Layer, tented both sides, 38 vias

## Nets (pads, with @x,y where several pads share a name; then routed paths per layer and width w, separated by ;. In a path a pad name is that pad's centre, name@x,y a point inside that pad or via, vN(x,y) a via of type N, cw(c..) or ccw(c..) an arc to the next point about the centre after c; other vN are vias at no path point)
1Q0: CN1.8 U2.15 | length 7.3
  Top Layer w0.254: U2.15@21.925,10.925 21.925,8.577 22.591,7.911 22.591,6.85 23.81,5.631 23.81,4.69 CN1.8@24,4.5
1Q1: CN1.10 U2.1 | length 39.5
  Top Layer w0.254: U2.1@23.197,16.578 U2.1@23.195,16.575 23.195,17.709 23.546,18.059 24.816,18.059 26.441,16.434 v1(33.858,16.434) ; v1(32.537,2.94) 33.883,4.285 v1(33.883,7.578)
  Bottom Layer w0.254: CN1.10@21.46,4.5 21.46,2.924 21.641,2.743 32.18,2.743 32.376,2.94 v1(32.537,2.94) ; v1(33.858,16.434) 33.883,16.409 v1(33.883,7.578)
1Q2: CN1.1 U2.2 | length 18.4
  Top Layer w0.254: v3(21.9,18.3) 21.913,18.287 21.913,16.588 U2.2@21.925,16.575
  Bottom Layer w0.254: v3(21.9,18.3) 21.9,14.4 24.706,11.594 27.051,11.594 30.982,7.663 30.997,7.663 31.605,7.055 CN1.1@31.605,7.04
1Q3: CN1.3 U2.3 | length 17.2
  Top Layer w0.254: v3(20.6,18.3) 20.628,18.272 20.628,16.603 U2.3@20.655,16.575
  Bottom Layer w0.254: v3(20.6,18.3) 20.6,14.3 24,10.9 25.22,10.9 CN1.3@29.08,7.04
1Q4: CN1.13 U2.4 | length 18.3
  Top Layer w0.254: U2.4@19.385,16.575 19.393,16.583 19.393,18.293 v3(19.4,18.3)
  Bottom Layer w0.254: CN1.13@16.38,7.04 12.6,10.82 12.6,13.1 17.8,18.3 v3(19.4,18.3)
1Q5: CN1.17 U2.5 | length 15.2
  Top Layer w0.254: CN1.17@11.3,7.04 11.3,13.46 12.875,15.035 17.735,15.035 18.129,15.429 U2.5@18.129,16.561
1Q6: CN1.14 U2.6 | length 33.7
  Top Layer w0.254: CN1.14@16.38,4.5 14.38,2.5 7.7,2.5 7.3,2.9 7.3,13.072 12.923,18.694 16.002,18.694 16.845,17.851 U2.6@16.845,16.575
1Q7: CN1.19 U2.7 | length 16.3
  Top Layer w0.254: CN1.19@8.76,7.04 8.76,13.307 13.453,18 15.3,18 15.575,17.725 U2.7@15.575,16.575
2Q0: CN2.8 U3.15 | length 8.3
  Top Layer w0.254: CN2.8@106.42,135.715 107.7,134.435 107.7,131.941 106.825,131.066 U3.15@106.825,128.325
2Q1: CN2.10 U3.1 | length 15.5
  Top Layer w0.254: U3.1@105.555,122.675 105.578,122.697 105.578,124.478 v3(105.6,124.5) ; v3(108,130.4) 110.2,132.6 110.2,134.475 CN2.10@108.96,135.715
  Bottom Layer w0.254: v3(105.6,124.5) 108,126.9 v3(108,130.4)
2Q2: CN2.1 U3.2 | length 20.5
  Top Layer w0.254: v3(106.8,120.194) 106.812,120.206 106.812,122.662 U3.2@106.825,122.675
  Bottom Layer w0.254: CN2.1@98.8,133.175 98.8,131.654 99.441,131.013 99.441,124.587 103.728,120.3 106.694,120.3 v3(106.8,120.194)
2Q3: CN2.3 U3.3 | length 19.7
  Top Layer w0.254: U3.3@108.095,122.675 108.098,122.673 108.098,121.002 v3(108.1,121)
  Bottom Layer w0.254: CN2.3@101.34,133.175 101.34,131.587 100.365,130.612 100.365,124.851 104.217,121 v3(108.1,121)
2Q4: CN2.13 U3.4 | length 23.9
  Top Layer w0.254: U3.4@109.365,122.675 109.365,120.835 109.6,120.6 v3(117.4,120.6)
  Bottom Layer w0.254: CN2.13@114.04,133.175 117.4,129.815 v3(117.4,120.6)
2Q5: CN2.17 U3.5 | length 17.2
  Top Layer w0.254: U3.5@110.651,122.691 110.651,123.851 112.208,125.408 117.665,125.408 119.12,126.863 CN2.17@119.12,133.175
2Q6: CN2.14 U3.6 | length 29
  Top Layer w0.254: U3.6@111.905,122.675 111.905,124.105 112.7,124.9 118.712,124.9 120.459,126.647 120.459,136.248 119.198,137.51 114.629,137.51 114.04,136.921 CN2.14@114.04,135.715
2Q7: CN2.19 U3.7 | length 17.5
  Top Layer w0.254: U3.7@113.175,122.675 113.175,123.967 113.6,124.392 119.544,124.392 121.66,126.508 CN2.19@121.66,133.175
+3V3: C2.2 C3.2 C4.2 C5.2 C6.2 C10.2 C11.2 CN6_DS1.5 CN6_DS2.5 CN6_DS3.5 CN6_DS4.5 CN7_DS5.5 CN7_DS6.5 CN7_DS7.5 CN7_DS8.5 CN12.1 R1.2 R8.2 R9.2 R10.2 R20.2 R21.2 R22.2 R23.2 R24.2 R25.2 R26.2 R27_DS1.1 R27_DS2.1 R27_DS3.1 R27_DS4.1 R28_DS1.1 R28_DS2.1 R28_DS3.1 R28_DS4.1 R31_DS5.1 R31_DS6.1 R31_DS7.1 R31_DS8.1 R32_DS5.1 R32_DS6.1 R32_DS7.1 R32_DS8.1 U1.16 U2.10 U2.16 U3.10 U3.16 U4.16 U5.16 U6.16 U10.16 U11.1 U11.2 U11.3 U11.16 U12.2 U13.1 U13.2 | length 630.4
  Top Layer w0.254: U2.10@15.575,10.925 15.581,10.919 15.581,9.519 v1(15.6,9.5) ; v1(21.412,94.107) v1@21.438,94.132 ; U6.16@23.188,87.336 23.188,86.159 v1(23.19,86.157) ; U2.16@23.195,10.925 23.195,9.505 v1(23.2,9.5) ; C4.2@23.282,65.255 C4.2@23.282,65.405 ; U4.16@23.391,58.66 23.391,57.558 v1(23.393,57.556) ; U5.16@23.434,72.807 23.434,71.714 v1(23.451,71.697) ; C5.2@23.494,79.451 C5.2@23.519,79.426 ; R10.2@35.943,68.767 R10.2@36.093,68.767 ; 46.4,49 46.426,49.026 49.384,49.026 U1.16@50.615,47.795 ; U10.16@68.375,9.025 71.375,9.025 C10.2@71.4,9 ; 85.958,9.242 85.958,9.042 85.891,8.975 84.275,8.975 84.1,8.8 84.1,8.474 84.249,8.325 ; U11.3@86.025,7.675 84.273,7.675 84.099,7.849 84.099,8.176 84.249,8.325 ; U11.2@86.025,8.325 84.249,8.325 ; U11.16@91.775,8.975 94.775,8.975 C11.2@94.8,9 ; U3.16@105.555,128.325 105.578,128.347 105.578,130.278 v3(105.6,130.3) ; U3.10@113.175,128.325 113.188,128.337 113.188,129.887 v3(113.2,129.9)
  Top Layer w0.61: CN6_DS3.5@9.77,29.04 14.03,33.3 R28_DS3.1@15.575,33.3 15.6,33.325 18.8,33.325 R27_DS3.1@18.825,33.35 24.96,33.35 CN6_DS4.5@29.77,28.54 34.13,32.9 R28_DS4.1@35.35,32.9 R27_DS4.1@38.6,32.9 ; CN6_DS1.5@10.02,46.29 14.23,50.5 R28_DS1.1@15.7,50.5 R27_DS1.1@19,50.5 25.31,50.5 CN6_DS2.5@29.27,46.54 33.53,50.8 R28_DS2.1@34.8,50.8 R27_DS2.1@38,50.8 38.15,50.8 39.95,49 46.4,49 ; v1(21.387,65.405) C4.2@23.282,65.405 ; v1(21.387,68.783) 21.403,68.767 R10.2@35.943,68.767 ; v1(21.412,79.883) 21.438,79.908 C5.2@23.511,79.908 ; v1@21.438,94.132 C6.2@23.613,94.132 ; U2.16@23.214,10.906 C2.2@25.494,10.906 ; C2.2@25.501,10.923 27.253,10.923 28.05,11.72 ; v3(28.065,12.97) 28.05,12.955 28.05,11.63 28.392,11.288 29.8,11.288 71.4,11.288 ; U12.2@30.69,132.556 30.702,132.568 42.688,132.568 CN12.1@42.7,132.58 49.95,132.58 U13.1@57.78,124.75 U13.2@60.32,124.75 63.87,128.3 C3.2@103.1,128.3 105.536,128.3 105.555,128.319 U3.16@105.555,128.325 ; R1.2@36.195,78.451 36.093,78.35 R10.2@36.093,68.767 36.243,68.767 36.439,68.572 36.439,68.422 38.481,66.38 38.481,65.176 39.7,63.957 R24.2@40.986,63.957 ; C10.2@71.375,9.025 71.375,11.263 71.4,11.288 ; 85.958,9.242 85.958,11.288 ; C11.2@94.8,9 94.8,11.288 ; v3(103.2,42.1) 103.225,42.075 103.225,40.525 R8.2@103.25,40.5 R23.2@103.25,37.75 R25.2@103.25,35 103.275,34.975 103.275,33.425 v3(103.3,33.4) ; v3(103.2,56.1) 103.225,56.125 103.225,57.725 R9.2@103.25,57.75 R20.2@103.25,60.5 R21.2@103.25,63 R22.2@103.25,65.5 ; R26.2@103.267,27.358 R26.2@103.267,27.508 ; R26.2@103.292,27.508 103.292,25.765 v1(103.302,25.756) ; R31_DS5.1@117.25,32.75 R32_DS5.1@120,32.75 124.08,32.75 CN7_DS5.5@125.5,34.17 127.417,32.253 129.553,32.253 130.9,33.6 133.6,33.6 138.902,33.6 139.612,34.31 CN7_DS6.5@141.81,34.31 ; CN7_DS8.5@141.75,10.62 140.33,9.2 R32_DS8.1@136.5,9.2 R31_DS8.1@133.5,9.2 126.97,9.2 CN7_DS7.5@125.5,10.67 123.83,9 R32_DS7.1@120.25,9 R31_DS7.1@117.25,9 117.1,9 114.812,11.288 94.8,11.288 ; 71.4,11.288 85.958,11.288 ; 85.958,11.288 94.8,11.288
  Bottom Layer w0.254: v1(15.6,9.5) v1(23.2,9.5) ; 21.4,86.3 21.543,86.157 ; v3(105.6,130.3) 106.896,131.596 111.475,131.596 113.171,129.9 v3(113.2,129.9)
  Bottom Layer w0.61: CN6_DS3.5@9.77,29.04 12.503,31.773 12.503,43.807 CN6_DS1.5@10.02,46.29 10.247,46.29 21.514,57.556 ; 21.543,86.157 v1(23.19,86.157) ; v1(23.393,57.556) 21.514,57.556 ; v1(23.451,71.697) 21.4,71.697 ; v3(28.065,12.97) 28.065,14.916 33,19.851 33,25.31 CN6_DS4.5@29.77,28.54 ; U12.2@30.702,132.568 U12.2@30.69,132.556 30.546,132.7 24.1,132.7 21.4,130 21.4,93.4 21.4,86.3 21.4,79.2 21.4,71.697 ; CN12.1@42.688,132.568 CN12.1@42.7,132.58 ; U13.1@57.78,124.75 U13.2@60.32,124.75 ; v3(103.2,42.1) v3(103.2,56.1) ; v3(103.3,11.3) v3(103.3,33.4) ; CN7_DS8.5@141.75,10.62 143.27,9.1 146.543,9.1 146.9,9.457 146.9,29.22 CN7_DS6.5@141.81,34.31 ; 21.4,71.697 21.4,64.5 21.4,57.67 21.514,57.556
+5V: C7.2 CN11.1 DP1.3 DP1.8 DP2.3 DP2.8 DP3.3 DP3.8 R14.2 U1.6 U7.7 U7.8 | length 235.4
  Top Layer w0.254: 45.187,59.233 49.353,59.233 U1.6@50.615,60.495
  Top Layer w0.406: 44.602,59.207 44.628,59.233 45.187,59.233
  Top Layer w0.61: DP1.3@11,56.49 11,53.872 11.963,52.908 37.236,52.908 43.536,59.207 44.602,59.207 ; U1.6@50.615,60.495 79.113,60.495 v3(79.121,60.503) ; v3(79.096,90.348) 79.105,90.339 128.118,90.339 CN11.1@128.152,90.373
  Top Layer w0.889: C7.2@105.725,115.2 106.875,115.2 107.675,116 108.803,116 U7.8@108.979,116.176
  Top Layer w1.016: R14.2@105.7,113.225 105.717,113.225 105.725,113.233 C7.2@105.725,115.2
  Top Layer w1.473: CN11.1@128.5,90.33 128.5,94.324
  Top Layer w2.032: U7.8@108.979,116.176 U7.7@108.979,113.636 110.564,113.636 113.01,111.19 113.01,103.99 116.816,100.184 122.64,100.184 128.5,94.324
  Bottom Layer w0.61: DP1.3@11,56.49 DP1.8@11,64.01 DP2.3@11,70.615 DP2.8@11,78.135 DP3.3@11,84.74 DP3.8@11,92.26 ; v3(79.096,90.348) 79.108,90.335 79.108,60.515 v3(79.121,60.503)
  Bottom Layer w2.032: U7.7@108.979,113.636 U7.8@108.979,116.176
+6V_S1: C8.2 CN4.2 R16.2 U8.7 U8.8 | length 23
  Top Layer w0.889: R16.2@75.219,112.598 75.794,112.598 ; C8.2@75.219,117.043 75.768,117.043
  Top Layer w1.27: CN4.2@74.422,104.851 74.466,104.895 74.683,104.895 76.061,106.273 76.061,106.312 78.511,108.763 78.511,113.604 U8.7@78.479,113.636 77.441,112.598 75.794,112.598 ; 75.768,117.043 77.612,117.043 U8.8@78.479,116.176
  Top Layer w2.032: U8.7@78.479,113.636 U8.8@78.479,116.176
  Bottom Layer w2.032: U8.7@78.479,113.636 U8.8@78.479,116.176
+6V_S2: C9.2 CN5.2 R17.2 U9.7 U9.8 | length 21.8
  Top Layer w1.27: CN5.2@43.917,105.258 43.961,105.302 44.215,105.302 48.006,109.093 48.006,113.609 U9.7@47.979,113.636 46.763,112.42 45.136,112.42 45.11,112.395 ; 45.263,117.018 47.137,117.018 U9.8@47.979,116.176
  Top Layer w2.032: U9.7@47.979,113.636 U9.8@47.979,116.176
  Bottom Layer w2.032: U9.7@47.979,113.636 U9.8@47.979,116.176
+11V1: CN1.2 CN1.4 CN2.2 CN2.4 CN8.3 Q1.2 U7.3 U7.4 U8.3 U8.4 U9.3 U9.4 | length 289.3
  Top Layer w1.524: CN2.2@98.8,135.715 CN2.4@101.34,135.715
  Top Layer w2.032: U9.3@66.521,113.636 U9.4@66.521,116.176 ; U8.3@97.021,113.636 U8.4@97.021,116.176 ; U7.4@127.521,116.176 U7.3@127.521,113.636 133.614,113.636 Q1.2@136.5,110.75 136.5,99.568 CN8.3@143.434,92.634
  Bottom Layer w1.524: CN1.4@29.08,4.5 CN1.2@31.62,4.5 34.362,4.5 ; 95.885,135.56 96.04,135.715 CN2.2@98.8,135.715 CN2.4@101.34,135.715
  Bottom Layer w2.032: 34.442,4.42 42.824,4.42 44.602,2.642 62.208,2.642 63.398,3.832 63.398,110.514 U9.3@66.521,113.636 ; U9.4@66.521,116.176 U9.3@66.521,113.636 ; 95.885,135.56 94.894,134.569 94.894,130.683 97.021,128.556 U8.4@97.021,116.176 ; U7.4@127.521,116.176 127.521,113.576 123.698,109.753 100.904,109.753 U8.3@97.021,113.636 U8.4@97.021,116.176 ; U9.3@66.521,113.636 69.286,110.871 84.087,110.871 89.392,116.176 U8.4@97.021,116.176
CONN_INF/LED_MOSI: CN1.16 CN2.16 U3.9 | length 231.7
  Top Layer w0.254: v1(17.1,2.5) 17.974,1.626 34.926,1.626 39,5.7 v1(39,6.8) ; v1(39,13.6) 39.708,14.308 59.808,14.308 60.678,15.178 v1(60.678,26.607) ; v1(60.683,119.9) 60.683,120.754 61.595,121.666 101.366,121.666 105.7,126 113.3,126 114.445,127.145 U3.9@114.445,128.325 ; U3.9@114.453,128.333 114.453,129.561 115.21,130.317 116.917,130.317 117.828,131.228 117.828,134.467 CN2.16@116.58,135.715
  Bottom Layer w0.254: CN1.16@13.84,4.5 15.84,2.5 v1(17.1,2.5) ; v1(39,6.8) v1(39,13.6) ; v1(60.678,26.607) 60.683,26.612 v1(60.683,119.9)
D\S\_\I\N\T\_\1\: R27_DS1.2 R29_DS1.2 U11.4 | length 111.7
  Top Layer w0.254: R27_DS1.2@19,48.5 R29_DS1.2@19,45.9 22.38,45.9 v1(22.403,45.923) ; v1(22.39,21.095) 24.409,19.075 25.237,19.075 25.922,18.39 39.065,18.39 40.513,16.942 56.871,16.942 v1(57.734,17.805) ; v1(59.741,4.521) 59.741,3.756 59.94,3.556 74.472,3.556 77.941,7.025 U11.4@86.025,7.025
  Bottom Layer w0.254: v1(22.39,21.095) 22.403,21.107 v1(22.403,45.923) ; v1(57.734,17.805) 56.845,16.916 56.845,13.97 59.792,11.024 59.792,4.572 v1(59.741,4.521)
D\S\_\I\N\T\_\2\: R27_DS2.2 R29_DS2.2 U11.5 | length 91.8
  Top Layer w0.254: R27_DS2.2@38,48.8 R29_DS2.2@38,46.5 40.825,46.5 41.808,45.517 41.808,40.411 43.307,38.913 v1(86.284,38.913) ; U11.5@86.025,6.375 87.833,6.375 v1(87.859,6.35)
  Bottom Layer w0.254: v1(86.284,38.913) 86.284,7.874 87.808,6.35 v1(87.859,6.35)
D\S\_\I\N\T\_\3\: R27_DS3.2 R29_DS3.2 U11.6 | length 95.1
  Top Layer w0.254: R27_DS3.2@18.825,31.35 18.821,31.347 R29_DS3.2@18.821,29.042 20.971,29.042 24.968,25.044 24.968,22.327 26.924,20.371 38.379,20.371 41.3,17.45 55.626,17.45 v1(57.556,19.38) ; v1(57.709,4.42) 57.718,4.428 58.35,4.428 59.73,3.048 76.609,3.048 79.286,5.725 U11.6@86.025,5.725
  Bottom Layer w0.254: v1(57.556,19.38) 56.337,18.161 56.337,13.76 58.09,12.007 58.09,11.167 58.667,10.59 58.667,5.349 57.738,4.42 v1(57.709,4.42)
D\S\_\I\N\T\_\4\: R27_DS4.2 R29_DS4.2 U11.7 | length 86.3
  Top Layer w0.254: R27_DS4.2@38.6,30.9 38.687,30.813 38.822,30.948 40.473,30.948 40.996,31.471 40.996,32.918 44.403,36.326 48.039,36.326 83.926,36.326 v1(83.947,36.347) ; R29_DS4.2@38.608,28.407 R27_DS4.2@38.608,30.734 ; v1(82.855,4.699) 83.972,4.699 84.348,5.075 U11.7@86.025,5.075
  Bottom Layer w0.254: v1(82.855,4.699) 83.947,5.791 v1(83.947,36.347)
D\S\_\I\N\T\_\5\: R31_DS5.2 R33_DS5.2 U11.9 | length 62.2
  Top Layer w0.254: U11.9@91.775,4.425 97.084,4.425 98.679,6.02 104.369,6.02 108.499,1.889 114.614,1.889 115.697,2.972 v1(115.697,4.242) ; v1(115.697,33.477) 115.726,33.506 115.726,34.08 116.368,34.722 117.222,34.722 R31_DS5.2@117.25,34.75 R33_DS5.2@117.25,37.25
  Bottom Layer w0.254: v1(115.697,4.242) v1(115.697,33.477)
D\S\_\I\N\T\_\6\: R31_DS6.2 R33_DS6.2 U11.10 | length 82.9
  Top Layer w0.254: U11.10@91.775,5.075 96.82,5.075 98.501,6.756 104.877,6.756 109.144,2.489 113.69,2.489 114.63,3.429 114.63,4.928 115.646,5.944 v1(134.95,5.944) ; v1(132.258,35.611) R31_DS6.2@134.151,35.611 ; R31_DS6.2@134.162,35.611 R33_DS6.2@134.162,37.85
  Bottom Layer w0.254: v1(132.258,35.611) 132.258,33.807 134.95,31.115 v1(134.95,5.944)
D\S\_\I\N\T\_\7\: R31_DS7.2 R33_DS7.2 U11.11 | length 34.1
  Top Layer w0.254: U11.11@91.775,5.725 96.751,5.725 100.424,9.398 v1(108.356,9.398) ; v1(108.382,13.005) 109.412,11.974 116.276,11.974 116.727,11.523 116.727,11.373 R31_DS7.2@117.1,11 ; R31_DS7.2@117.25,11 R33_DS7.2@117.25,13.75
  Bottom Layer w0.254: v1(108.356,9.398) 108.356,12.979 v1(108.382,13.005)